# Altium PCB HalfBridge.PcbDoc
Units mil, origin at the board's own origin, x right, y up, seen from the top; angles counter-clockwise.
Board outline 3860 x 2300 mil, 2 copper layers (Top Layer, Bottom Layer); 48 components, 33 nets, 156 pads, 14 vias.
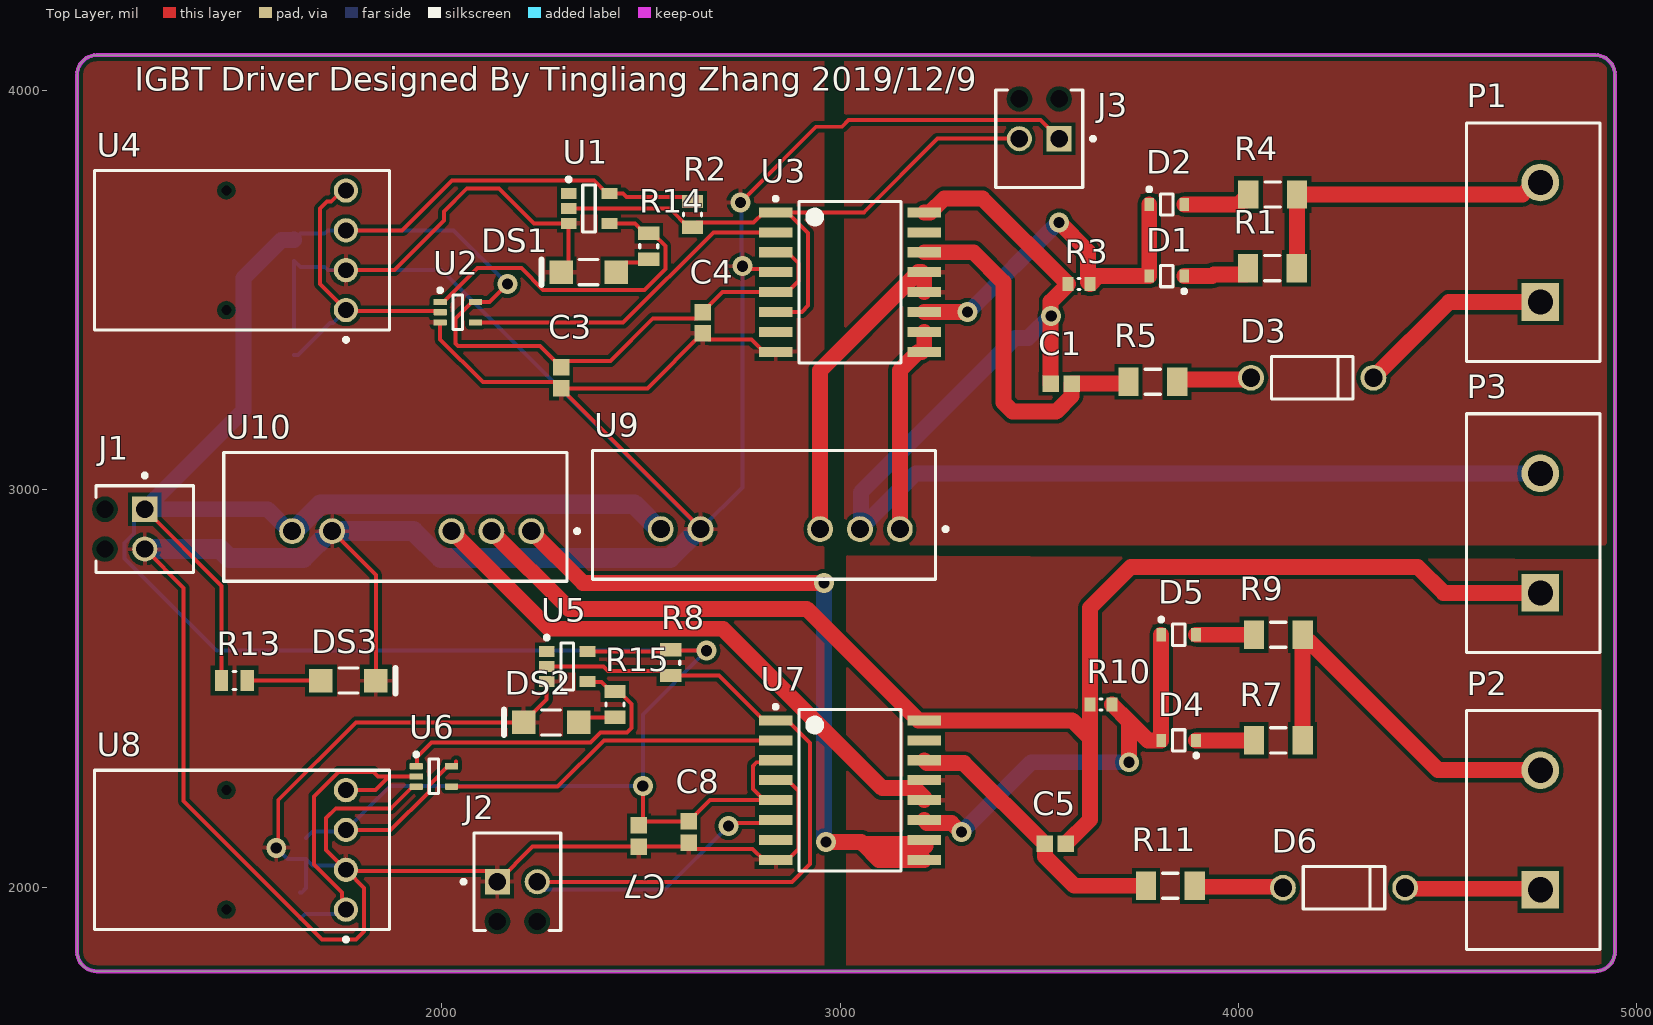
[diagram p0: Top Layer view]
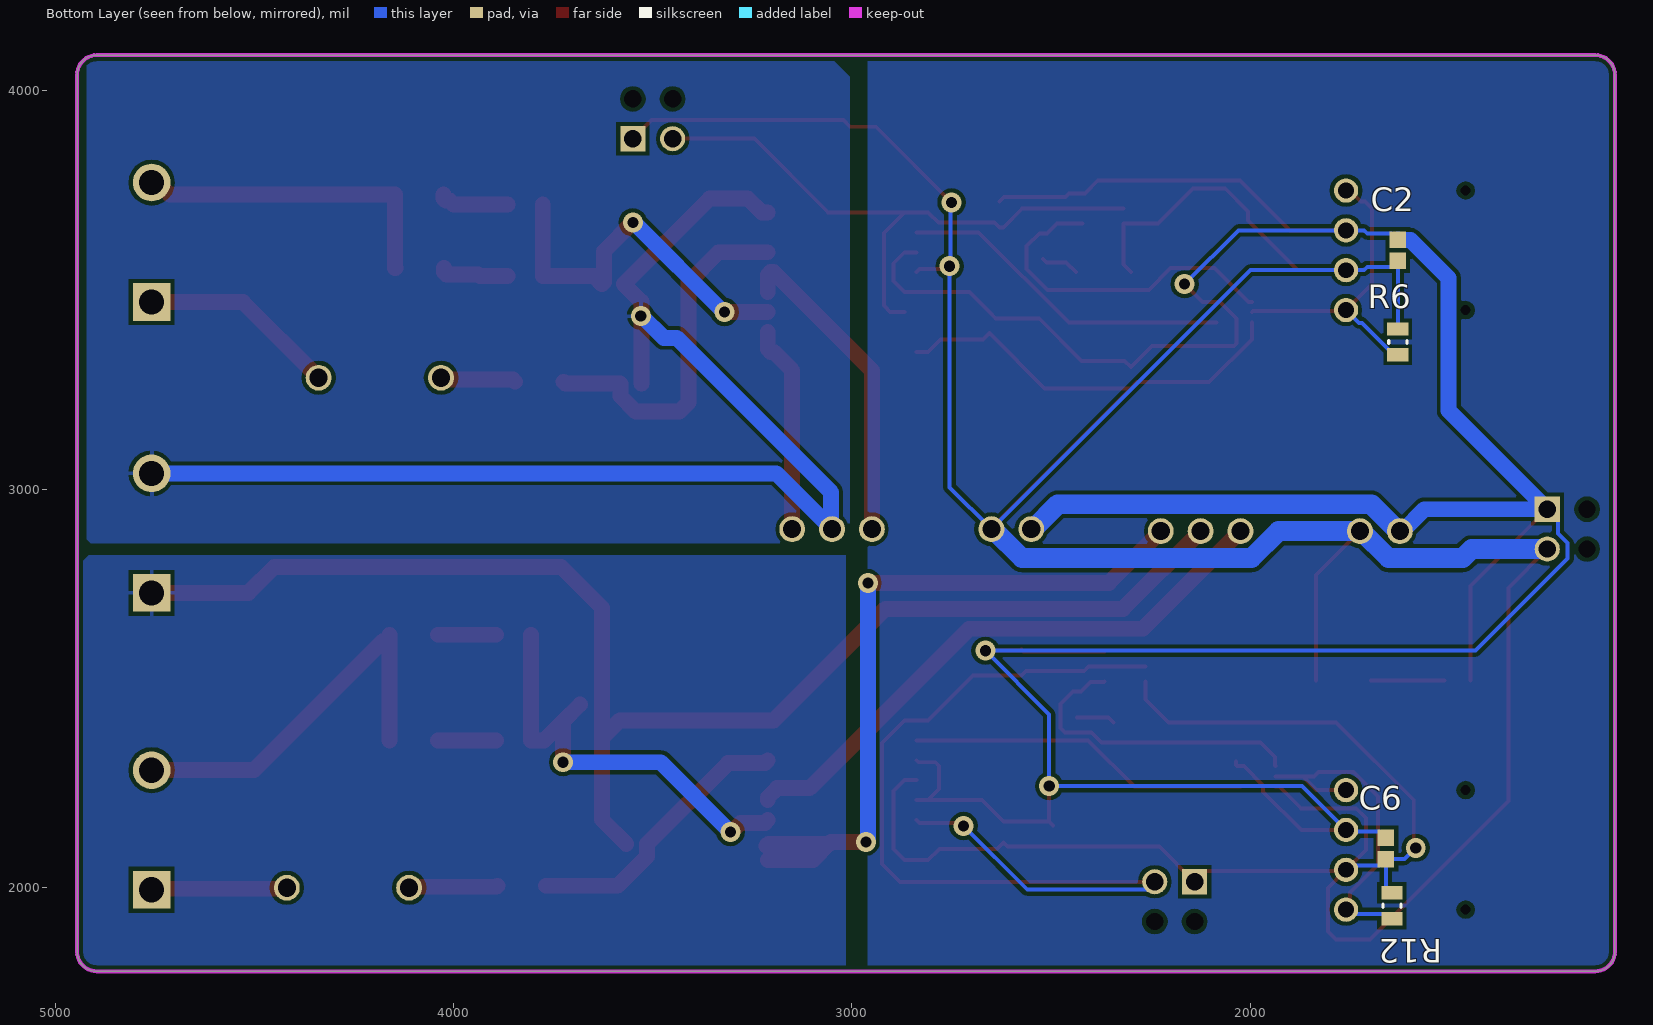
[diagram p1: Bottom Layer view, seen from below]

## Layer stack, top to bottom
Top Solder: solder mask 0.4, Solder Resist, Dk 3.5
Top Layer: signal copper 1.4
Dielectric 1: dielectric 12.6, FR-4, Dk 4.8
Bottom Layer: signal copper 1.4
Bottom Solder: solder mask 0.4, Solder Resist, Dk 3.5

## Board outline
1085,1840 1085,4040 cw(c1135,4040) 1135,4090 4895,4090 cw(c4895,4040) 4945,4040 4945,1840 cw(c4895,1840) 4895,1790 1135,1790 cw(c1135,1840)

## Design rules (kind name [scope] priority, off if disabled: settings)
Clearance [All] p1: gap=10 ignorepadtopadclearanceinfootprint=FALSE except(0: Arc-Hole Track-Hole SMDPad-Hole THPad-Hole Via-Hole Fill-Hole Poly-Hole Region-Hole Text-Hole; 5: SMDPad-SMDPad)
PolygonConnect [All] p1: connectstyle=Relief reliefconductorwidth=10 reliefentries=4 polygonreliefangle="90 Angle" airgapwidth=10
RoutingVias [All] p1: holewidth=28 width=50 viastyle="Through Hole" minholewidth=28 minwidth=50 maxholewidth=28 maxwidth=50
SolderMaskExpansion [All] p1: expansion=4
Width [All] p1: maxlimit=50 minlimit=5 preferedwidth=10 minimp=50.000000 maximp=50.000000 favimp=50.000000
30 further rules are at their usual default settings.

## Components (designator, comment, footprint, x,y, rotation, side; value= is the part's Value field where it differs from the comment)
C1 "CC0603JRNPO9BN101" CAPC1608X90X40ML10T20 3555,3265 r180 top
C2 "CC0603JRNPO9BN101" CAPC1608X90X40ML10T20 1629.68,3600 r270 bottom
C3 "CC0603JRNPO9BN101" CAPC1608X90X40ML10T20 2300,3280 r270 top
C4 "CC0603JRNPO9BN101" CAPC1608X90X40ML10T20 2655,3418.43 r270 top
C5 "CC0603JRNPO9BN101" CAPC1608X90X40ML10T20 3540,2110 r0 top
C6 "CC0603JRNPO9BN101" CAPC1608X90X40ML10T20 1660,2098.43 r270 bottom
C7 "CC0603JRNPO9BN101" CAPC1608X90X40ML10T20 2495,2130 r270 top
C8 "CC0603JRNPO9BN101" CAPC1608X90X40ML10T20 2620,2140 r270 top
D1 "BAS20HT1G" ONSC-SOD-323-2-477-02_V 3820,3535 r180 top
D2 "BAS20HT1G" ONSC-SOD-323-2-477-02_V 3820,3715 r0 top
D3 "UF4007" FAIR-DO-41-2 4185,3280 r0 top
D4 "BAS20HT1G" ONSC-SOD-323-2-477-02_V 3850,2370 r180 top
D5 "BAS20HT1G" ONSC-SOD-323-2-477-02_V 3850,2635 r0 top
D6 "UF4007" FAIR-DO-41-2 4265,2000 r0 top
DS1 "HSMH-C150" AVAG-HSMX-C150_V 2368.9,3545 r180 top
DS2 "HSMH-C150" AVAG-HSMX-C150_V 2275,2415 r180 top
DS3 "HSMH-C150" AVAG-HSMX-C150_V 1766.1,2520 r0 top
J1 "1725656" PHOE-1725656-2 1255,2900 r270 top
J2 "1725656" PHOE-1725656-2 2190,2015 r0 top
J3 "1725656" PHOE-1725656-2 3500,3880 r180 top
P1 "691311400102" 691311400102 4740,3620 r90 top
P2 "691311400102" 691311400102 4740,2145 r90 top
P3 "691311400102" 691311400102 4740,2890 r90 top
R1 "CRCW120610R0FKEA" RESC3216X60X45ML10T20 4085,3555 r0 top
R2 "1kOhm 0805" RESC2013X50X30LL20T20 2630,3690 r90 top
R3 "47K 5% 0603(1608)" RESC0603(1608)_L 3600,3515 r180 top value="47000.00 Ohm"
R4 "CRCW120610R0FKEA" RESC3216X60X45ML10T20 4086.02,3740 r0 top
R5 "CRCW1206100RFKEA" RESC3216X60X45ML10T20 3785,3270 r0 top
R6 "10kOhm 0805" RESC2013X50X30LL20T20 1630,3370 r270 bottom
R7 "CRCW120610R0FKEA" RESC3216X60X45ML10T20 4100,2370 r0 top
R8 "1kOhm 0805" RESC2013X50X30LL20T20 2575,2565 r90 top
R9 "CRCW120610R0FKEA" RESC3216X60X45ML10T20 4100,2635 r0 top
R10 "47K 5% 0603(1608)" RESC0603(1608)_L 3655,2460 r180 top value="47000.00 Ohm"
R11 "CRCW1206100RFKEA" RESC3216X60X45ML10T20 3828.98,2005 r0 top
R12 "10kOhm 0805" RESC2013X50X30LL20T20 1645,1955 r270 bottom
R13 "500Ohm 0805" RESC2013X50X30LL20T20 1480,2520 r180 top
R14 "500Ohm 0805" RESC2013X50X30LL20T20 2520,3610 r270 top
R15 "500Ohm 0805" RESC2013X50X30LL20T20 2435,2460 r270 top
U1 "NC7S04M5X" FAIR-SOT23-5_V 2370,3705 r0 top
U2 "SN74AHC1G126DCKT" DCK0005A_N 2040.71,3444.41 r0 top
U3 "HCPL-316J-000E" AVAG-SOIC-16_V 3025,3520 r0 top
U4 "HFBR-2521Z" BCM-HFBR-2521Z-4 1610,3600 r270 top
U5 "NC7S04M5X" FAIR-SOT23-5_V 2315,2555 r0 top
U6 "SN74AHC1G126DCKT" DCK0005A_N 1980.71,2279.41 r0 top
U7 "HCPL-316J-000E" AVAG-SOIC-16_V 3025,2245 r0 top
U8 "HFBR-2521Z" BCM-HFBR-2521Z-4 1610,2095 r270 top
U9 "NCS1S1205SC" MURA-NCS1S1205SC-5_V 2850,2900 r180 top
U10 "NCS1S1205SC" MURA-NCS1S1205SC-5_V 1925,2895 r180 top

## Footprints (in the part's own frame and the unit in brackets; to place one, negate y for a bottom-side part, rotate by r counter-clockwise, add the part's x,y. Pads: shape width x height; smd on the part's side, far side on the other; paste and mask are expansions set on the pad)
691311400102 [mm] "7.62 mm - Closed Vertical PCB Header - 2p"
  rect 2.4x2.4 hole 1.6: 1(-3.81,-0.45)
  round 2.4 hole 1.6: 2(3.81,-0.45)
  silkscreen extent -7.61,-4.25 7.61,4.25, body extent -7.62,-4.26 7.62,4.24, height 12.05
AVAG-HSMX-C150_V [mm] "SMD, 2-Leads, Body 3.2x1.6mm"
  rect 1.5x1.5 smd: 1(-1.75,0) 2(1.75,0)
  silkscreen extent -0.6,-0.8 3,0.8, body extent -1.6,-0.8 1.6,0.8, height 1.1
AVAG-SOIC-16_V [mm] "SOIC, 16-Leads, Body 10.312x7.493mm, Pitch 1.27mm"
  rect 2.16x0.64 smd: 1(-4.735,4.445) 2(-4.735,3.175) 3(-4.735,1.905) 4(-4.735,0.635) 5(-4.735,-0.635) 6(-4.735,-1.905) 7(-4.735,-3.175) 8(-4.735,-4.445) 9(4.735,-4.445) 10(4.735,-3.175) 11(4.735,-1.905) 12(4.735,-0.635) 13(4.735,0.635) 14(4.735,1.905) 15(4.735,3.175) 16(4.735,4.445)
  silkscreen extent -4.86,-5.15 3.25,5.44
BCM-HFBR-2521Z-4 [mm] "Horizontal Package, 4-Leads, Body 18.8 x 10.16, Height 7.62 mm"
  round 1.55 hole 1.01: 1(3.81,3.81) 2(1.27,3.81) 3(-1.27,3.81) 4(-3.81,3.81)
  round 0 hole 0.64 unplated: 5(-3.81,-3.81) 8(3.81,-3.81)
  silkscreen extent -5.08,-12.22 5.83,6.58, body extent -5.08,-12.22 5.08,6.58, height 7.62
CAPC1608X90X40ML10T20 [mm] "Chip Capacitor, 2-Leads, Body 1.7x0.9mm, IPC Low Density"
  rect 1.05x1.05 smd: 1(-0.675,0) 2(0.675,0)
  body extent -0.85,-0.45 0.85,0.45, height 0.9
DCK0005A_N [mm] "SOT23, 5-Leads, Body 2.15x1.4mm, Pitch 0.65mm, IPC Medium Density"
  rrect25% 0.85x0.4 smd: 1(-1.125,0.65) 2(-1.125,0) 3(-1.125,-0.65) 4(1.125,-0.65) 5(1.125,0.65)
  silkscreen extent -1.25,-1.1 0.3,1.52, body extent -1.14,-1 1.14,1, height 0.94
FAIR-DO-41-2 [mm] "THD, 2-Leads, Body 5.2x2.72mm, Pin Spacing 7.8mm"
  round 1.65 hole 1.15: 1(-3.9,0) 2(3.9,0)
  silkscreen extent -2.6,-1.35 2.6,1.35, body extent -4.29,-1.17 4.29,1.17, height 2.35
FAIR-SOT23-5_V [mm] "SOT23, 5-Leads, Body 3x1.7mm, Pitch 0.95mm"
  rect 1x0.7 smd: 1(-1.3,0.95) 2(-1.3,0) 3(-1.3,-0.95) 4(1.3,-0.95) 5(1.3,0.95)
  silkscreen extent -1.42,-1.5 0.4,1.97, body extent -1.5,-1.5 1.5,1.5, height 1.45
MURA-NCS1S1205SC-5_V [mm] "THD, 5-Leads, Body 21.87x8.2mm, Pitch 2.54mm"
  round 1.65 hole 1.15: 1(-7.62,0) 2(-5.08,0) 3(-2.54,0) 6(5.08,0) 7(7.62,0)
  silkscreen extent -10.67,-5.01 11.98,3.19, body extent -9.89,-5.01 11.98,3.19, height 11.3
ONSC-SOD-323-2-477-02_V [mm] "SOD, 2-Leads, Body 1.7x1.25mm"
  rect 0.63x0.83 smd: 1(-1.115,0) 2(1.115,0)
  silkscreen extent -1.24,-0.67 0.4,1.09, body extent -0.85,-0.63 0.85,0.63, height 1.06
PHOE-1725656-2 [mm] "Connector, 2-Leads, Body 6.2x5.4mm, Pitch 2.54mm"
  rect 1.6x1.6 hole 1.1: 1(-1.27,0)
  round 1.6 hole 1.1: 2(1.27,0)
  round 0 hole 1.1 unplated: MH1(-1.27,-2.54) MH2(1.27,-2.54)
  silkscreen extent -3.54,-3.1 2.77,3.1, body extent -2.77,-3.1 2.77,3.1, height 9
RESC0603(1608)_L [mm] "Chip Resistor, Body 1.6x0.8mm, IPC High Density"
  rect 0.7x0.9 smd: 1(-0.7,0) 2(0.7,0)
  silkscreen extent -0.05,-0.35 0.05,0.35, body extent -0.85,-0.47 0.85,0.47, height 0.6
RESC2013X50X30LL20T20 [mm] "Chip Resistor, 2-Leads, Body 2.00x1.25mm, IPC High Density"
  rect 0.85x1.35 smd: 1(-0.825,0) 2(0.825,0)
  silkscreen extent -0.1,-0.58 0.1,0.58, body extent -1.1,-0.72 1.1,0.72, height 0.5
RESC3216X60X45ML10T20 [mm] "Chip Resistor, 2-Leads, Body 3.20x1.60mm, IPC Low Density"
  rect 1.3x1.8 smd: 1(-1.55,0) 2(1.55,0)
  silkscreen extent -0.5,-0.8 0.5,0.8, body extent -1.65,-0.85 1.65,0.85, height 0.6

## Part data
C1 C2 C3 C4 C5 C6 C7 C8: library part CMP-2100-03594-1, "Chip Capacitor, 100 pF, +/- 5%, 50 V, -55 to 125 degC, 0603 (1608 Metric), RoHS, Tape and Reel", Capacitance=100pF, Case/Package=0603, Case Code (Metric)=1608, Dielectric=C0G, Insulation Resistance=100GR, Manufacturer=Yageo, Max Operating Temperature=125degC, Min Operating Temperature=-55degC, Package Description="2-Pin Surface Mount Device, Body 1.6 x 0.8 mm", Package Quantity=1, Temperature Coefficient=30ppm/degC, Tolerance=5%, Voltage=50V, Case Code (Imperial)=0603, Composition=Ceramic, Datasheet URL=http://www.yageo.com/documents/recent/UPY-GP_NP0_16V-to-50V_14.pdf, Datasheet Version="Rev. 14, 07/2016", Depth=0.8mm, Height=0.8mm, Lead Free=LeadFree, Length=1.6mm, Manufacturer URL=http://www.yageo.com/, Mount=SurfaceMount, Number of Pins=2, Package Reference=0603, Packaging=TapeandReel, Radiation Hardening=No, REACH SVHC=Unknown, RoHSCompliant=True, Termination=SMD/SMT, Thickness=0.035inch, Voltage Rating=50V, Voltage Rating (DC)=50V, Width=0.8mm
D1 D2 D4 D5: library part CMP-1054-00067-1, "High Voltage Switching Diode, 2-Pin SOD-323, Pb-Free, Tape and Reel", Manufacturer="On Semiconductor", ComponentLink1Description="Manufacturer URL", ComponentLink1URL=http://www.onsemi.com/, ComponentLink2Description=Datasheet, ComponentLink2URL=http://www.onsemi.com/pub_link/Collateral/BAS20HT1-D.PDF, ComponentLink3Description="Package Specification", ComponentLink3URL=http://www.onsemi.com/pub_link/Collateral/477-02.PDF.1, Configuration=Single, DatasheetVersion="Rev. 6", IF Max (A)=0.2, Mounting Technology="Surface Mount", PackageDescription="2-Pin SOD, Body 1.7 x 1.25 mm", PackageReference=SOD-323-2-477-02, PackageVersion="Rev. H, 03/2007", Packing="Tape and Reel", PartNumber=BAS20HT1G, RoHS=TRUE, trr Max (ns)=50
D3 D6: library part CMP-2000-05028-1, "Fast Rectufuer, 2.08 W, 2-Pin DO-41, RoHS, Tape and Reel", Capacitance @ Vr, F=17pF@4V,1MHz, Current - Average Rectified (Io)=1A, Current - Reverse Leakage @ Vr=10μA@1000V, Manufacturer=Fairchild, Operating Temperature - Junction=-65degC~150degC, Package / Case=DO-204AL,DO-41,Axial, Package Description="2-Pin Axial Lead, Dia 2.375 mm, Body Length 4.63 mm", Package Reference=DO-41-2, Package Version="Rev. 2, 09/2008", Standard Package=1, Supplier Device Package=DO-41, Voltage - DC Reverse (Vr) (Max)=1000V(1kV), Voltage - Forward (Vf) (Max) @ If=1.7V@1A, Category=DiscreteSemiconductorProducts, Datasheet URL=https://www.fairchildsemi.com/datasheets/UF/UF4001.pdf, Datasheet Version="Rev. 1.1.0, 11/2014", Diode Type=Standard, Family=Diodes,Rectifiers-Single, Manufacturer URL=https://www.fairchildsemi.com/, Mounting Type=ThroughHole, Online Catalog=StandardDiode, Other Names=UF4007CT, Package URL=http://www.fairchildsemi.com/dwg/DO/DO41A.pdf, Packaging=CutTape(CT), Reverse Recovery Time (trr)=75ns, Speed="FastRecovery= / 200mA(Io)"
DS1 DS2 DS3: library part CMP-2000-06426-1, "LED Uni-Color Red, 65 mW, 25 mA, -40 to 85 degC, 2-Pin SMD, RoHS, Tape and Reel", Emitting Color=Red, Forward Current=25mA, Forward Voltage=2.6V, Manufacturer=Avago, Operating Temperature Classification=Industrial, Operating Temp Range=-40Cto85C, Package Description="2-Pin Surface Mount Device, Body 3.2 x 1.6 mm", Package Reference=HSMX-C150, Package Type=ChipLed, Power Dissipation=78W, Reverse Voltage=5V, Test Current (It)=20mA, Chip Material=GaAlAs, Datasheet URL=http://media.digikey.com/pdf/Data%20Sheets/Avago%20PDFs/HSMz-Czzz.pdf, Datasheet Version=03/2012, DELETED=Compliant, Dominant Wave Length=639nm, High Brightness=No, Lens Dimensions=2x1.6x0.6mm, Lens Type=ColorlessDiffused, Luminous Intensity=17mcd, Lum Intensity=17mcd, Main Category=ChipLED, Manufacturer URL=http://www.avagotech.com/, Mounting=SurfaceMount, Mounting Technology=SurfaceMount, Number of  Elements=1, Packaging=TapeandReel, Peak Wavelength=660nm, Pin Count=2, Product Depth (mm)=1.6mm, Product Height (mm)=1.1mm, Product Length (mm)=3.2mm, Rad Hardened=No, Shape Type=Rectangular, Type=Uni-Color, Viewing Angle=170deg
J1 J2 J3: library part CMP-2000-05299-1, "Male Header, Pitch 2.54 mm, 1 x 2 Position, Height 9 mm, Tail Length 3.5 mm", Colour=Green, Manufacturer="Phoenix Contact", Content=250pc(s), Datasheet URL=http://datasheet.octopart.com/1725656-Phoenix-Contact-datasheet-5302866.pdf, Datasheet Version=Apr-08, Industrial packaging=Yes, Manufacturer part No.=1725656, Manufacturer URL=http://www.phoenixcontact.com/, Number of contacts=2, Pitch=2.54mm, Type=MPT0,5/2-2,54
P1 P2 P3: library part CMP-1502-02408-1, "Serie 3114 - 7.62mm Close Vertical PCB Header WR-TBL, 2 pin", Manufacturer="Wurth Elektronik", Operating Temperature=-40to105degC, Datasheet URL=http://katalog.we-online.de/em/datasheet/6913114001xx.pdf, Gender=Male, Manufacturer URL=http://www.we-online.de, Mounting Technology=THT, Package Reference=691311400102, Packaging=Box, Part Number=691311400102, Pin Number=2, Pitch=7.62mm, Publisher=WurthElektronik
R1 R4 R7 R9: library part CMP-2003-04815-1, Manufacturer="Vishay Dale", Part Number=CRCW120610R0FKEA
R2 R6 R8 R12 R13 R14 R15: library part CMP-2001-04896-1, Manufacturer="Vishay Dale", Part Number=CRCW08050000Z0EA
R3 R10: library part CMP-1012-00114-1, "47K 0.1W 5% 0603 (1608 Metric)  SMD", Case-EIA=0603, Case-Metric=1608, Power="0.1 W", Tolerance="5 %", Technology=SMT
R5 R11: library part CMP-2003-04801-1, Manufacturer="Vishay Dale", Part Number=CRCW1206100RFKEA
U1 U5: library part CMP-2000-06807-1, "TinyLogic(R) HS Inverter, 2.6 mA, 2 to 6 V, -40 to 85 degC, 5-Pin SOT23, RoHS, Tape and Reel", Current - Output High, Low=2.6mA,2.6mA, Current - Quiescent (Max)=1μA, Manufacturer="Fairchild Semiconductor", Operating Temperature=-40°C~85°C, Package / Case=SC-74A,SOT-753, Package Description="5-Pin Small Outline Transistor, Body 2.9 x 1.6 mm, Pitch 0.95 mm", Package Reference=SOT23-5, Package Version=08/2015, Standard Package=1, Supplier Device Package=SOT-23-5, Voltage - Supply=2V~6V, Category=IntegratedCircuits(ICs), Datasheet URL=https://www.fairchildsemi.com/datasheets/NC/NC7S04.pdf, Datasheet Version=08/2004, Dynamic Catalog=7S, Family=Logic-GatesandInverters, Features=-, Logic Level - High=1.5V, Logic Level - Low=0.5V, Logic Type=Inverter,Buffer, Manufacturer URL=https://www.fairchildsemi.com/, Max Propagation Delay @ V, Max CL=17ns@6V,50pF, Mounting Technology=SurfaceMount, Mounting Type=SurfaceMount, Number of Circuits=1, Number of Inputs=1, Other Names=NC7S04M5XDKR, Package URL=https://www.fairchildsemi.com/package-drawings/MA/MA05B.pdf, Packaging=Digi-Reel?, Product Change Notification=MoldCompoundChange12/Dec/2007, Series=7S
U2 U6: library part CMP-0859-00345-3, "Single Bus Buffer Gate With 3-State Outputs, DCK0005A, SMALL T&R", F @ Nom Voltage(Max)(Mhz)=75, Generic Part Number=SN74AHC1G126, ICC @ Nom Voltage(Max)(mA)=0.01, Manufacturer="Texas Instruments", Operating Temperature Range(C)="-40 to 125,-40 to 85", Rating=Catalog, tpd @ Nom Voltage(Max)(ns)=11.5,7.5, Voltage(Nom)(V)=3.3,5, 3-State Output=Yes, Bits(#)=1, DatasheetVersion=SCLS379K, Input Type=CMOS, Logic=True, Output Drive (IOL/IOH)(Max)(mA)=50/-50, Output Type=CMOS, PackageReference=DCK0005A, Schmitt Trigger=No, Sub-Family="Non-Inverting Buffer/Driver", Technology Family=AHC, VCC(Max)(V)=5.5, VCC(Min)(V)=2
U3 U7: library part CMP-2000-06392-1, "Gate Drive Optocoupler with Integrated (VCE) Desaturation Detection and Fault Status Feedback, 2.5 A, 15 to 30 V, -40 to 100 degC, 16-Pin SOIC, RoHS, Tube", Common Mode Voltage=1500V, Manufacturer=AvagoTechnologies, Maximum Forward Current=N/A, Maximum Operating Supply Voltage=30V, Maximum Peak Output Current=2.5A, Maximum Power Dissipation=1200mW, Maximum Working Insulation Voltage=1230Vp, Minimum Isolation Voltage=3750Vrms, Operating Temperature=-40to100C, Package Description="16-Pin Small Outline Integrated Circuit, Body 10.312 x 7.493 mm, Pitch 1.27 mm", Package Reference=SOIC-16, Supplier_Package=SOIC, Agency Approvals=CSA/DIN/EN/IEC/UL/VDE, Datasheet URL=http://www.avagotech.com/docs/AV02-0717EN, Datasheet Version=03/2015, Dimension=10.31x7.49x3.51mm, Family=HCPL-316J, Manufacturer URL=http://www.avagotech.com/, Maximum Fall Time=100(Typ)ns, Maximum Forward Voltage=N/A, Maximum Propagation Delay Time(tPHL)=500ns, Maximum Propagation Delay Time(tPLH)=500ns, Maximum Pulse Width Distortion=300ns, Maximum Reverse Voltage=N/A, Maximum Rise Time=100(Typ)ns, Minimum Common Mode Rejection=15kV/us, Minimum Forward Current=N/A, Minimum Forward Voltage=N/A, Minimum Peak Output Current=N/A, Mounting=SurfaceMount, Mounting Technology=SurfaceMount, Number of Channels per Chip=2, Output Type=N/A, Packaging=N/A, Part No=HCPL-316J-000E, Pin_Count=16, RoHS=Yes, Screening Level=N/A
U4 U8: library part CMP-2000-05068-1, "The Versatile Fiber Optic Connection, 5 MBd, -40 to 85 degC, 4-Pin, RoHS, Rail/Tube", Manufacturer=Broadcom, Maximum Operating Supply Voltage=7V, Maximum Operating Temperature=85C, Maximum Output Current=25mA, Maximum Power Dissipation=40mW, Minimum Operating Supply Voltage=-0.5V, Minimum Operating Temperature=-40C, Typical Operating Supply Voltage=1.8V, Connector Type=Round, Datasheet URL=http://docs.avagotech.com/docs/AV02-1501EN, Datasheet Version=Sep-14, Family=HFBR-2521, Manufacturer URL=http://www.broadcom.com/, Maximum Data Rate=5MBd, Mounting=ThroughHole, Package URL=http://docs.avagotech.com/docs/AV02-1501EN, Peak Wavelength=600nm, Pin_Count=6, Product Height=7.6mm, Product Length=18.8mm, Product Type=OpticalFiber, Product Width=12.2mm, Type=RX
U9 U10: library part CMP-1287-00003-1, "Isolated 1 W 4:1 Input Single Output DC/DC Converter, 5 V, -40 to 105 degC, 5-Pin THD, Pb-Free, Tube", Generic Part Number=NCS1, Output Current="0.2 A", Supply Voltage Max="18 V", Supply Voltage Min="4.5 V", Temperature Max="105 degC", Temperature Min="-40 degC", ComponentLink1Description="Manufacturer URL", ComponentLink1URL=http://www.murata.com/, ComponentLink2Description=Datasheet, ComponentLink2URL=http://power.murata.com/data/power/ncl/kdc_ncs1.pdf, Mounting Technology="Through Hole", Number of Outputs=1, PackageDescription="5-Pin Through Hole Device, Body 21.87x8.2mm, Pitch 2.54mm", Packing=Tube, PartNumber=NCS1S1205SC, RoHS=TRUE, VOUT="5 V"

## Via types
v1: diameter 50, hole 28, Top Layer to Bottom Layer, 14 vias

## Nets (pads, with @x,y where several pads share a name; then routed paths per layer and width w, separated by ;. In a path a pad name is that pad's centre, name@x,y a point inside that pad or via, vN(x,y) a via of type N, cw(c..) or ccw(c..) an arc to the next point about the centre after c; other vN are vias at no path point)
+5: C2.1 C3.1 C4.1 C6.1 C7.1 C8.1 J1.1 R2.2 R8.2 R13.2 U1.5 U2.5 U3.3 U3.5 U4.3 U5.5 U6.5 U7.3 U7.5 U8.3 U9.7 U10.7 | length 9879
  Top Layer w10: J1.1 1447.52,2757.48 R13.2 ; U8.3 1872.26,2145 1968.15,2240.88 1968.15,2257.01 2016.14,2305 U6.5 U6.5@2033.86,2305 ; U4.3 1901.1,3650 2025.63,3774.53 2383.15,3774.53 2415.28,3742.4 U1.5 2455.87,3742.4 2464.06,3734.21 2618.27,3734.21 R2.2 ; U6.5@2036.73,2307.87 2036.73,2316.73 ; v1(2165,3515) 2120,3470 U2.5 2076.14,3470 2035,3428.86 2035,3365.86 2040.86,3360 2246.57,3360 C3.1 2315.67,3322.24 2423.96,3322.24 2531.04,3429.33 2639.33,3429.33 C4.1 2705,3495 U3.5 2868.5,3495 2896.1,3522.6 2896.1,3567.4 2868.5,3595 U3.3 ; U5.5 2569.92,2592.4 R8.2 2577.48,2595 v1(2665,2595) ; C7.1 C7.1@2505,2166.57 ; v1(2505,2255) C7.1@2505,2166.57 ; U7.5 U7.5@2808.66,2220 ; U7.3 2833.58,2315 2790,2315 2781.06,2306.06 2781.06,2247.6 U7.5@2808.66,2220 ; C7.1@2505,2166.57 C8.1 2673.43,2220 U7.5@2808.66,2220
  Bottom Layer w10: J1.1 1228.5,2923.5 1228.5,2889.26 1204.14,2864.9 1204.14,2825.86 1435,2595 v1(2665,2595) 2505,2435 v1(2505,2255) 1870,2255 U8.3 1755.67,2140.67 1675.67,2140.67 C6.1 ; C2.1 1645.35,3642.24 1706.73,3642.24 1714.49,3650 U4.3 2030,3650 v1(2165,3515)
  Bottom Layer w40: U10.7 1618.25,2895 1563.25,2950 J1.1 1502.6,3197.6 1502.6,3530.1 1598.4,3625.91 1629.02,3625.91 C2.1
  Bottom Layer w50: U10.7 1629.05,2895 1696.53,2962.48 2483.47,2962.48 2545.95,2900 U9.7
+15: U3.12 U3.13 U9.3 | length 807.8
  Top Layer w40: U9.3 2950,3298.7 3196.3,3545 3204.02,3545 3211.42,3537.6 U3.12
+15B: U7.12 U7.13 U10.3 | length 1469.9
  Top Layer w40: U10.3 2270,2650 2706.13,2650 3106.13,2250 3187.99,2250 3211.42,2226.57 U7.12
-15: U3.9 U3.10 U9.1 | length 525
  Top Layer w40: U9.1 3150,3298.7 3196.3,3345 3204.02,3345 3211.42,3352.4 U3.10
-15B: U7.9 U7.10 U10.1 | length 1865.3
  Top Layer w40: U10.1 2355,2765 v1(2960,2765) ; v1(2965,2115) 3052.71,2115 3057.71,2110 ; U7.9 3097.71,2070 3057.71,2110 ; 3215,2105 3210,2110 3057.71,2110
  Bottom Layer w40: v1(2960,2765) 2960,2122.71 2965,2117.71 v1(2965,2115)
AGND: C1.2 P3.2 R3.2 U3.16 U9.2 | length 3249.3
  Top Layer w40: U3.16 3226.54,3695 3261.54,3730 3357.44,3730 R3.2 3528.43,3470.98 C1.2
  Bottom Layer w40: U9.2 U9.2@3052.48,2902.48 ; v1(3530,3435) 3527.29,3435 3472.29,3380 3440,3380 3052.48,2992.48 U9.2@3052.48,2902.48 ; P3.2 3190,3040 U9.2@3052.48,2902.48
BGND: C5.2 P3.1 R10.2 U7.16 U10.2 | length 3535.2
  Top Layer w40: U10.2 2320,2700 2916.3,2700 3196.3,2420 U7.16 3582.44,2420 3627.44,2375 ; C5.2 3627.44,2170.87 3627.44,2375 ; P3.1 4515,2740 4450,2805 3730,2805 3627.44,2702.44 R10.2 3627.44,2375
DGND: C2.2 C3.2 C4.2 C6.2 C7.2 C8.2 DS1.2 DS2.2 DS3.2 J1.2 J2.1 J3.1 R6.1 R12.1 U1.3 U2.3 U3.4 U3.8 U4.2 U5.3 U6.3 U7.4 U7.8 U8.2 U9.6 U10.6 | length 12100
  Top Layer w10: J1.2 1352.57,2752.43 1352.57,2217.43 1700,1870 1785,1870 1805.51,1890.51 1805.51,1999.49 U8.2@1763.5,2041.5 ; v1(1585,2100) 1590,2105 1590,2220 1785,2415 DS2.2 2263.82,2472.72 U5.3 ; U10.6 1835,2785 DS3.2 ; U4.2 1881.37,3550 2005.63,3674.26 2005.63,3697 2063.16,3754.53 2144.49,3754.53 2231.42,3667.6 U1.3 2318.82,3563.82 DS1.2 ; U6.3 1927.56,2253.82 1873.23,2199.49 1734.49,2199.49 1710,2175 1710,2095 U8.2 U8.2@1763.5,2041.5 ; U2.3 1996.42,3376.16 2103.48,3269.09 2284.33,3269.09 C3.2 ; U9.6 2650,2903.43 C3.2 ; v1(2750,3720) 2940,3910 3005,3910 3021.5,3926.5 3503.5,3926.5 J3.1 ; v1(2755,3560) 2762.5,3552.5 2831.08,3552.5 U3.4 ; U7.4 2868.5,2270 2896.1,2242.4 2896.1,2097.6 2868.5,2070 U7.8 2808.66,2070 2780.91,2097.76 2635.67,2097.76 C8.2 2610,2103.43 C7.2 2228.43,2103.43 J2.1 2113.5,2041.5 U8.2@1763.5,2041.5 ; U3.8 2808.66,3345 2777.48,3376.18 2670.67,3376.18 C4.2 2516.57,3253.43 C3.2
  Bottom Layer w10: v1(1585,2100) 1585.27,2100 1613.42,2071.85 C6.2 ; R6.1 1629.68,3402.8 C2.2 1645.35,3557.76 1706.73,3557.76 1714.49,3550 U4.2 2000,3550 U9.6 2755,3005 v1(2755,3560) 2752.5,3562.5 2752.5,3717.5 v1(2750,3720) ; R12.1 1648.27,1987.48 1660,1999.21 C6.2 ; U8.2 1746.19,2045 1735.01,2056.18 1675.67,2056.18 C6.2
  Bottom Layer w50: J1.2 1444.49,2850 1466.97,2827.52 1653.47,2827.52 1720.95,2895 U10.6 1929.57,2895 1997.05,2827.52 2573.47,2827.52 2645.95,2900 U9.6
FAULT: J3.2 R2.1 U1.2 U3.1 U3.6 | length 1556.5
  Top Layer w10: U1.2 2572.68,3705 2620.16,3657.52 R2.1 2641.73,3669.25 2782.91,3669.25 2808.66,3695 U3.1 U3.1@2868.5,3695 ; U3.6@2868.5,3445 2904.14,3445 2920,3460.86 2920,3643.5 U3.1@2868.5,3695 ; J3.2 3244.58,3880 3059.58,3695 U3.1@2868.5,3695
FAULT_B: J2.2 R8.1 U5.2 U7.1 U7.6 | length 2427
  Top Layer w10: J2.2 2880,2015 2925,2060 2925,2363.5 2868.5,2420 U7.1 2808.66,2420 2696.14,2532.52 R8.1 2563.27,2544.25 2417.03,2544.25 2406.28,2555 U5.2 ; v1(2720,2155) 2727.5,2162.5 2831.08,2162.5 U7.6
  Bottom Layer w10: J2.2 2260,1995 2560,1995 v1(2720,2155)
NetC1_1: C1.1 R5.1 U3.14 | length 903.9
  Top Layer w40: U3.14 3335,3595 3410,3520 3410,3218.43 3433.43,3195 3542.19,3195 3580.91,3233.72 3580.91,3264.33 C1.1 3582.24,3265.67 3719.65,3265.67 R5.1
NetC5_1: C5.1 R11.1 U7.14 | length 704.9
  Top Layer w40: U7.14 3218.82,2312.6 3310.83,2312.6 C5.1 3514.09,2109.33 3514.09,2078.72 3587.81,2005 R11.1
NetD1_1: D1.1 R1.1 | length 174.1
  Top Layer w40: D1.1 3933.82,3535 3938.39,3539.57 4018.39,3539.57 4023.98,3545.16 R1.1
NetD1_2: D1.2 D2.1 R3.1 U3.11 | length 955.7
  Top Layer w40: U3.11 v1(3320,3445) ; v1(3550,3670) 3622.44,3597.56 3622.44,3520.12 R3.1 3647.56,3535 D1.2 D2.1
  Bottom Layer w40: v1(3320,3445) 3322.5,3445 3547.5,3670 v1(3550,3670)
NetD2_2: D2.2 R4.1 | length 177.2
  Top Layer w40: D2.2 4000,3715 4009.57,3724.57 4019.41,3724.57 4025,3730.16 R4.1
NetD3_1: D3.1 R5.2 | length 189.6
  Top Layer w40: R5.2 3851.25,3275.22 4026.68,3275.22 D3.1
NetD3_2: D3.2 P1.1 | length 497.9
  Top Layer w40: D3.2 4528.54,3470 P1.1
NetD4_1: D4.1 R7.1 | length 145.1
  Top Layer w40: D4.1 R7.1
NetD4_2: D4.2 D5.1 R10.1 U7.11 | length 1126.9
  Top Layer w40: U7.11 3218.82,2162.6 3279.7,2162.6 3302.29,2140 v1(3305,2140) ; R10.1 3725,2417.56 ; v1(3725,2315) 3725,2417.56 ; D5.1 D4.2 3772.56,2370 3725,2417.56
  Bottom Layer w40: v1(3305,2140) 3480,2315 v1(3725,2315)
NetD5_2: D5.2 R9.1 | length 145.1
  Top Layer w40: D5.2 R9.1
NetD6_1: D6.1 R11.2 | length 223.5
  Top Layer w40: R11.2 3892.5,2002.5 4108.96,2002.5 D6.1
NetD6_2: D6.2 P2.1 | length 341.2
  Top Layer w40: D6.2 4421.04,1997.5 4755.22,1997.5 P2.1
NetDS1_1: DS1.1 R14.2 | length 95.7
  Top Layer w10: DS1.1 2462.32,3569.53 2512.01,3569.53 R14.2
NetDS2_1: DS2.1 R15.2 | length 96.3
  Top Layer w10: DS2.1 2356.42,2427.52 R15.2
NetDS3_1: DS3.1 R13.1 | length 184.7
  Top Layer w10: R13.1 DS3.1
NetP1_2: P1.2 R1.2 R4.2 | length 808.5
  Top Layer w40: R1.2 4147.05,3556.02 R4.2 4712.97,3740 4742.97,3770 P1.2
NetP2_2: P2.2 R7.2 R9.2 | length 998.4
  Top Layer w40: R7.2 R9.2@4161.02,2625.16 ; R9.2 R9.2@4161.02,2625.16 ; P2.2 4501.02,2295 4176.46,2619.57 4166.61,2619.57 R9.2@4161.02,2625.16
NetR6_2: R6.2 U2.2 U4.1 U4.4 | length 780.9
  Top Layer w10: U4.4 1750.4,3750 1723.02,3722.62 1712.62,3722.62 1695,3705 1695,3515 U4.1 1762.87,3447.13 1993.7,3447.13 U2.2
  Bottom Layer w10: R6.2 1639.84,3337.52 1720.14,3417.82 1727.82,3417.82 U4.1
NetR12_2: R12.2 U6.2 U8.1 U8.4 | length 850.5
  Top Layer w10: U8.1 1750.24,1954.76 1750.24,1988.57 1680,2058.81 1680,2229.36 1741.15,2290.51 1828.72,2290.51 1839.83,2279.41 1868.11,2279.41 ; U8.4 1833.7,2245 1868.11,2279.41 ; U6.2 1868.11,2279.41
  Bottom Layer w10: R12.2 1656.73,1934.25 1735.45,1934.25 1746.19,1945 U8.1
NetR14_1: R14.1 U1.4 U2.1 | length 866.5
  Top Layer w10: U2.1 2005.28,3470 2090.28,3555 2200,3555 2254.53,3500.47 2509.19,3500.47 2561.57,3552.86 2561.57,3610.75 2529.84,3642.48 R14.1 2510.16,3642.48 2485.04,3667.6 U1.4
NetR15_1: R15.1 U5.4 U6.1 | length 786.2
  Top Layer w10: U6.1 1937.87,2306.46 1937.87,2327.87 1975,2365 2374.17,2365 2399.17,2390 2465.72,2390 2476.57,2400.86 2476.57,2460.75 2444.84,2492.48 R15.1 2425.16,2492.48 2400.87,2516.77 2367.01,2516.77 U5.4
NetU2_4: U2.4 U3.2 | length 847.3
  Top Layer w10: U2.4 2455.82,3418.82 2682,3645 U3.2
NetU6_4: U6.4 U7.2 | length 861.7
  Top Layer w10: U6.4 2291.27,2253.82 2407.45,2370 U7.2
pads on no net: J1.MH1 J1.MH2 J2.MH1 J2.MH2 J3.MH1 J3.MH2 U1.1 U3.7 U3.15 U4.5 U4.8 U5.1 U7.7 U7.15 U8.5 U8.8

## Polygon pours and split planes (outlines as drawn)
DGND on Top Layer (solid, pour order 14): 1085,4095 1090,4090 2960,4090 2960,1795 1080,1795
+15B on Top Layer (solid, pour order 6): 3015,2834.96 3015,1800 4910,1800 4910,2824.69
+15 on Top Layer (solid, pour order 4): 3010,4095 3010,2860 4920,2860 4925,2865 4925,4095
BGND on Bottom Layer (solid, pour order 16): 1090,4090 2960,4090 2960,1795 1090,1795 1085,1790
BGND on Bottom Layer (solid, pour order 12): 3015,2835 4915,2835 4935,2815 4935,1805 3015,1805
AGND on Bottom Layer (solid, pour order 10): 3050,4080 3005,4035 3005,2865 4910,2865 4920,2875 4920,4080

## Keep-outs
Keep-Out Layer:
  lines w10: 1085,1840 ccw(c1135,1840) 1135,1790 4895,1790 ccw(c4895,1840) 4945,1840 4945,4040 ccw(c4895,4040) 4895,4090 1135,4090 ccw(c1135,4040) 1085,4040 1085,4010 1085,1840

## Silkscreen, mask and mechanical layers (free items; w line width, h text height)
Top Overlay:
  text "IGBT Driver Designed By Tingliang Zhang 2019/12/9" at 1230,3980 h100